# Altium PCB PCB2.PcbDoc
Units mil, origin at the board's own origin, x right, y up, seen from the top; angles counter-clockwise.
Board outline 6000 x 4000 mil, 2 copper layers (Top Layer, Bottom Layer); 17 components, 10 nets, 40 pads, 0 vias.
Unrouted connection lines stored in the file: 30.
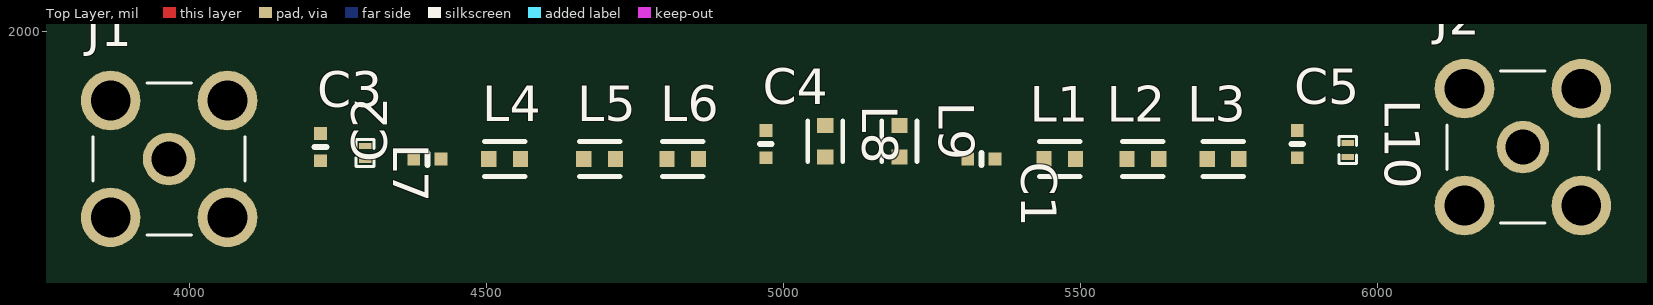
[diagram p0: Top Layer view]
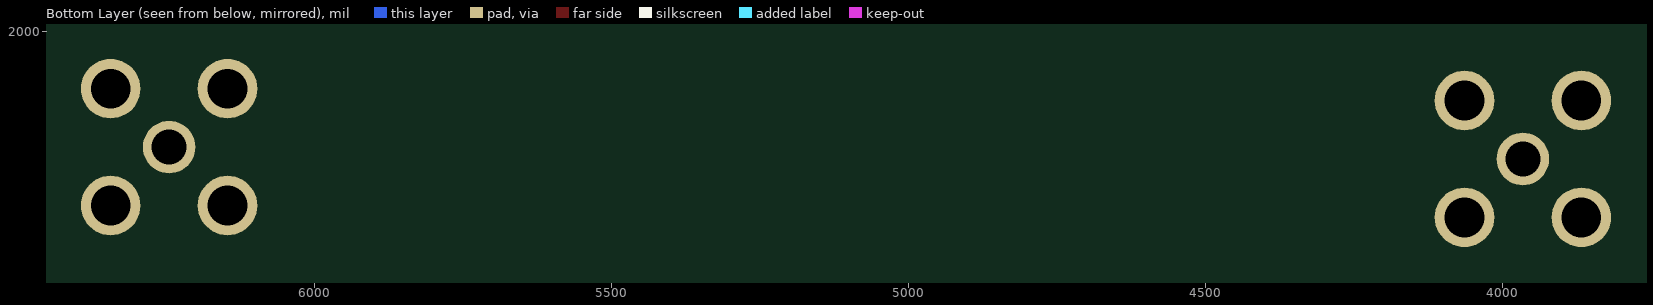
[diagram p1: Bottom Layer view, seen from below]

## Layer stack, top to bottom
Top Solder: solder mask 0.4, Solder Resist, Dk 3.5
Top Layer: signal copper 1.4
Dielectric 1: dielectric 12.6, FR-4, Dk 4.8
Bottom Layer: signal copper 1.4
Bottom Solder: solder mask 0.4, Solder Resist, Dk 3.5

## Board outline
1000,1000 7000,1000 7000,5000 1000,5000

## Design rules (kind name [scope] priority, off if disabled: settings)
Clearance [All] p1: gap=10 ignorepadtopadclearanceinfootprint=FALSE except(0: Arc-Hole Track-Hole SMDPad-Hole THPad-Hole Via-Hole Fill-Hole Poly-Hole Region-Hole Text-Hole; 11.81: Arc-Via Arc-Fill Arc-Poly Arc-Region Track-Via Track-Fill Track-Poly Track-Region)
HoleSize [All] p1: absolutevalues=TRUE maxlimit=118.11 minlimit=27.56 maxpercent=80.000 minpercent=20.000
MinimumSolderMaskSliver [All] p1: minsoldermaskwidth=4.92
PlaneConnect [All] p1: planeconnectstyle=Relief reliefexpansion=20 reliefentries=4 reliefconductorwidth=12 reliefairgap=10
PolygonConnect [All] p1: connectstyle=Relief reliefconductorwidth=19.68 reliefentries=4 polygonreliefangle="90 Angle" airgapwidth=7.87
RoutingVias [All] p1: holewidth=27.56 width=62.99 viastyle="Through Hole" minholewidth=27.56 minwidth=62.99 maxholewidth=27.56 maxwidth=62.99
SilkToSilkClearance [All] p1: silktosilkclearance=4.72
SilkToSolderMaskClearance [IsPad] p1: minsilkscreentomaskgap=3.94 clearancetoexposedcopper=TRUE
SolderMaskExpansion [All] p1: expansion=4 istentingtop=FALSE
Width [All] p1: maxlimit=120 minlimit=12 preferedwidth=20
25 further rules are at their usual default settings.

## Components (designator, comment, footprint, x,y, rotation, side; value= is the part's Value field where it differs from the comment)
C1 "0.5pF" SMD-0402C 5333,1785 r270 top value=0.015µF
C2 "0.5pF" SMD-0402C 4400,1785 r90 top value=0.015µF
C3 "470pF" SMD-0402C 4220,1805 r0 top value=0.015µF
C4 "680pF" SMD-0402C 4970,1810 r0 top value=0.015µF
C5 "470pF" SMD-0402C 5865,1810 r0 top value=0.015µF
J1 "SMACONNECTOR" LPRS_SMACONNECTOR 3965,1785 r0 top
J2 "SMACONNECTOR" LPRS_SMACONNECTOR 6245,1805 r0 top
L1 "220nH" FP-LQG18HH_00-MFG 5465,1785 r0 top
L2 "220nH" FP-LQG18HH_00-MFG 5605,1785 r0 top
L3 "220nH" FP-LQG18HH_00-MFG 5740,1785 r0 top
L4 "220nH" FP-LQG18HH_00-MFG 4530,1785 r0 top
L5 "220nH" FP-LQG18HH_00-MFG 4690,1785 r0 top
L6 "220nH" FP-LQG18HH_00-MFG 4830,1785 r0 top
L7 "0.67nH" "0302CS SERIES" 4295,1795 r270 top
L8 "1nH" FP-LQG18HH_00-MFG 5070,1815 r270 top
L9 "1nH" FP-LQG18HH_00-MFG 5195,1815 r270 top
L10 "0.67nH" "0302CS SERIES" 5950,1800 r270 top

## Footprints (in the part's own frame and the unit in brackets; to place one, negate y for a bottom-side part, rotate by r counter-clockwise, add the part's x,y. Pads: shape width x height; smd on the part's side, far side on the other; paste and mask are expansions set on the pad)
"0302CS SERIES" [mil] "Coilcraft Chip Inductor"
  rect 10x21 smd: 1(-12,0) 2(12,0)
  silkscreen extent -23,-15 23,15, body extent -17,-13 17,13, height 17
FP-LQG18HH_00-MFG [mm]
  rect 0.65x0.7 smd paste+0 mask+0: 1(-0.675,0) 2(0.675,0)
  silkscreen extent -0.87,-0.75 0.87,0.75, body extent -1.1,-0.58 1.1,0.58, height 0.25
LPRS_SMACONNECTOR [mm]
  round 2.25 hole 1.5: 1(0,0)
  round 2.55 hole 1.7: 2(2.5,2.5) 3(2.5,-2.5) 4(-2.5,-2.5) 5(-2.5,2.5)
  silkscreen extent -3.25,-3.25 3.25,3.25
SMD-0402C [mm]
  rect 0.55x0.55 smd: 1(0,0.584) 2(0,-0.584)
  silkscreen extent -0.25,0 0.25,0, body extent -0.25,-0.51 0.25,0.51, height 0.51

## Part data
C1 C2 C3 C4 C5: library part GCM155R71H153KA55D, "CAP CER 0.015UF 50V X7R 0402", Digi-Key Part Number=490-11956-1-ND, Manufacturer="Murata Electronics North America", Operating Temperature="-55°C ~ 125°C", Package / Case="0402 (1005 Metric)", Ratings=AEC-Q200, Temperature Coefficient=X7R, Tolerance=±10%, Voltage=50V, @ qty=0, Applications=Automotive, Datasheets=http://www.murata.com/~/media/webrenewal/support/library/catalog/products/capacitor/mlcc/c03e.ashx, Factory Stock=0, Features=-, Height - Seated (Max)=-, Image=//media.digikey.com/Renders/Murata%20Renders/ZRB-SERIES-0402.jpg, Lead Spacing=-, Lead Style=-, Minimum Quantity=1, Mounting Type="Surface Mount, MLCC", Packaging="Cut Tape (CT)", Part Number=GCM155R71H153KA55D, Part Status=Active, Quantity Available=31530, Series=GCM, Size / Dimension="0.039\" L x 0.020\" W (1.00mm x 0.50mm)", Thickness (Max)="0.022\" (0.55mm)", Unit Price (USD)=0.1
J1 J2: "SMA female RF coaxial connector for SMA male RF antennas.", Package=None, Availability=Unavailable, MP=SMACONNECTOR, Price=None
L1 L2 L3 L4 L5 L6 L8 L9: library part CMP-06042-016493-1, "Multilayer type RF Inductor 1.8nH ±0.3nH 0.1Ω 1100mA 0603", Case Code (Imperial)=0603, Case Code (Metric)=1608, Current Rating=500mA, DC Resistance (DCR)=100mR, Inductance=1.8nH, Max Operating Temperature=85°C, Min Operating Temperature=-55°C, Package Quantity=4000, Self Resonant Frequency=6GHz, Test Frequency=100MHz, Case/Package=0603, Core Material=Air, DC Current=500mA, Depth=0.95mm, Height=0.8mm, Height - Seated (Max)=0.037inch, Lead Free="Lead Free", Length=1.6mm, Max DC Current=500mA, Military Standard=Not, Mount="Surface Mount", Number of Pins=2, Packaging="Tape and Reel", Q Factor=12, Radiation Hardening=No, Rated Current-Max=500mA, REACH SVHC="No SVHC", RoHS Compliant=Yes, Series=LQG18H, Shielding=Unshielded, Termination=SMD/SMT, Width=0.8mm
L7 L10: library part 0302CS-N67XMB

## Nets (pads, with @x,y where several pads share a name; then routed paths per layer and width w, separated by ;. In a path a pad name is that pad's centre, name@x,y a point inside that pad or via, vN(x,y) a via of type N, cw(c..) or ccw(c..) an arc to the next point about the centre after c; other vN are vias at no path point)
GND: C3.1 C4.1 C5.1 J1.2 J1.3 J1.4 J1.5 J2.2 J2.3 J2.4 J2.5 L7.1 L8.1 L9.1 L10.1
NetC1_1: C1.1 L1.1
NetC1_2: C1.2 C4.2 L6.2 L8.2 L9.2
NetC2_1: C2.1 L4.1
NetC2_2: C2.2 C3.2 J1.1 L7.2
NetC5_2: C5.2 J2.1 L3.2 L10.2
NetL1_2: L1.2 L2.1
NetL2_2: L2.2 L3.1
NetL4_2: L4.2 L5.1
NetL5_2: L5.2 L6.1